# Altium PCB RCSS_B2B V3.0 20130320.PcbDoc (part 1 of 2)
Units mm, origin at the board's own origin, x right, y up, seen from the top; angles counter-clockwise.
Board outline 142.1 x 102.2 mm, 4 copper layers (Top Layer, Mid-Layer 1, Mid-Layer 2, Bottom Layer); 252 components, 153 nets, 735 pads, 222 vias.
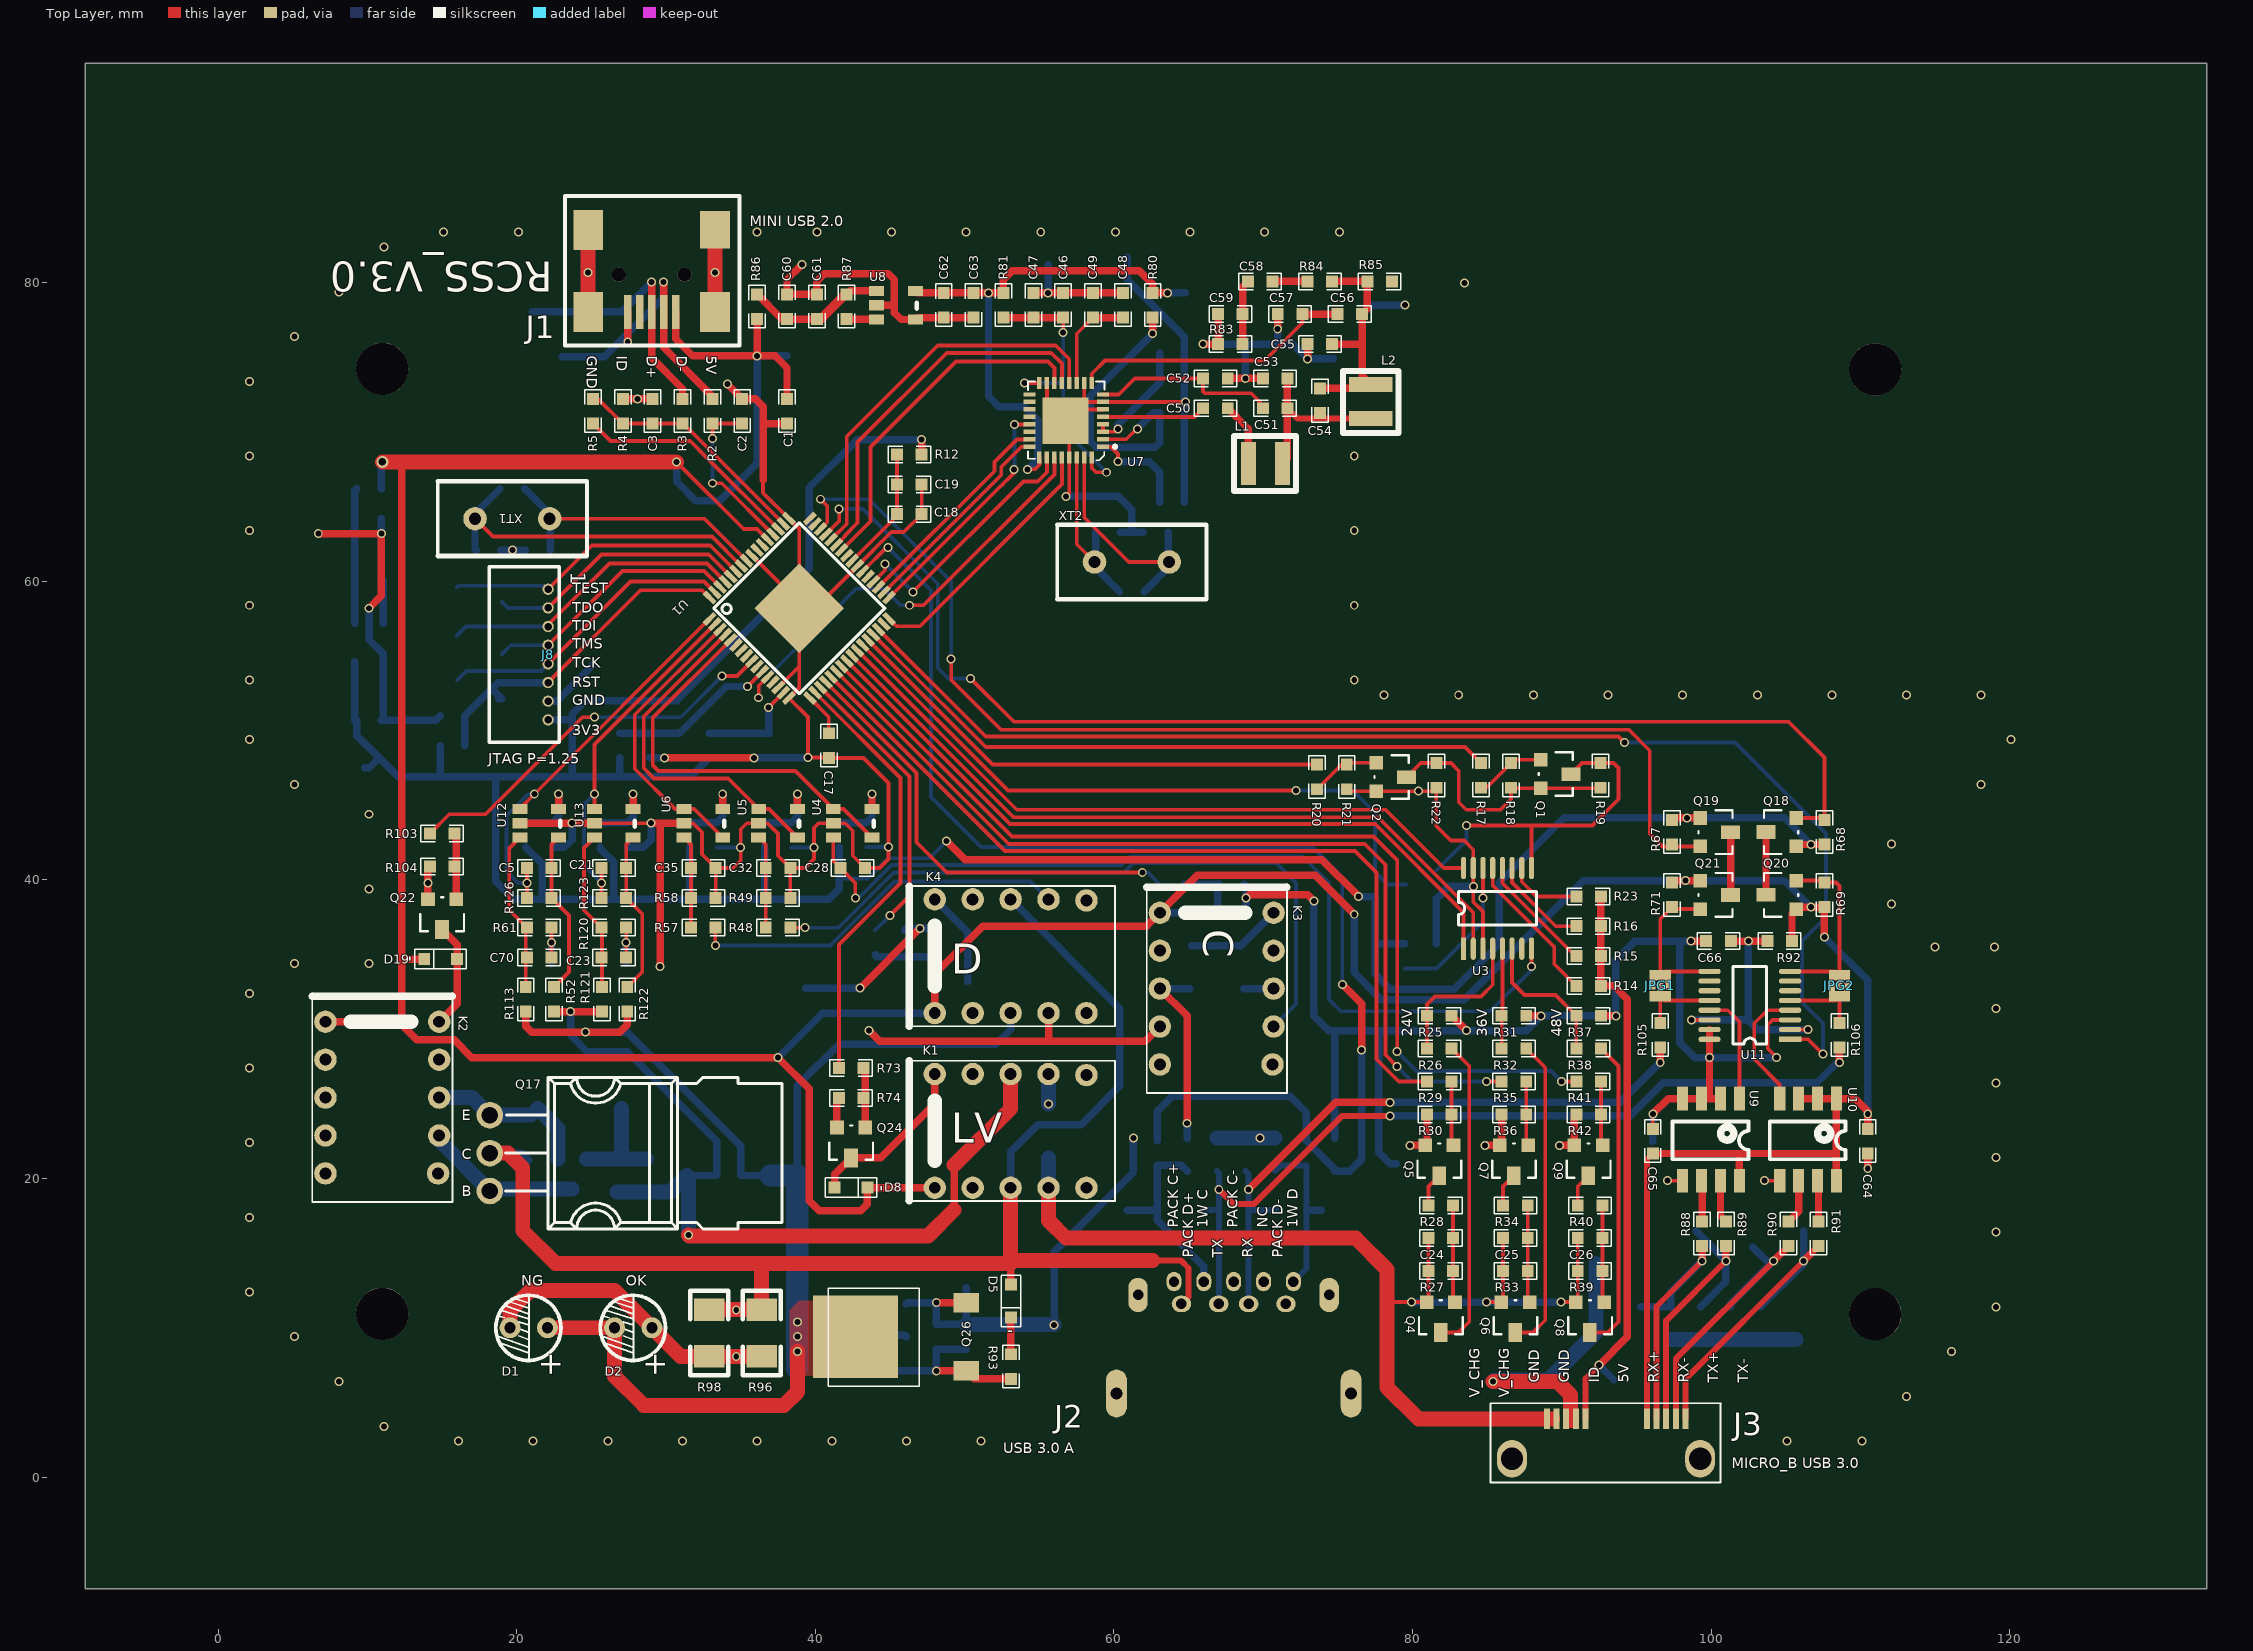
[diagram p0: Top Layer view]
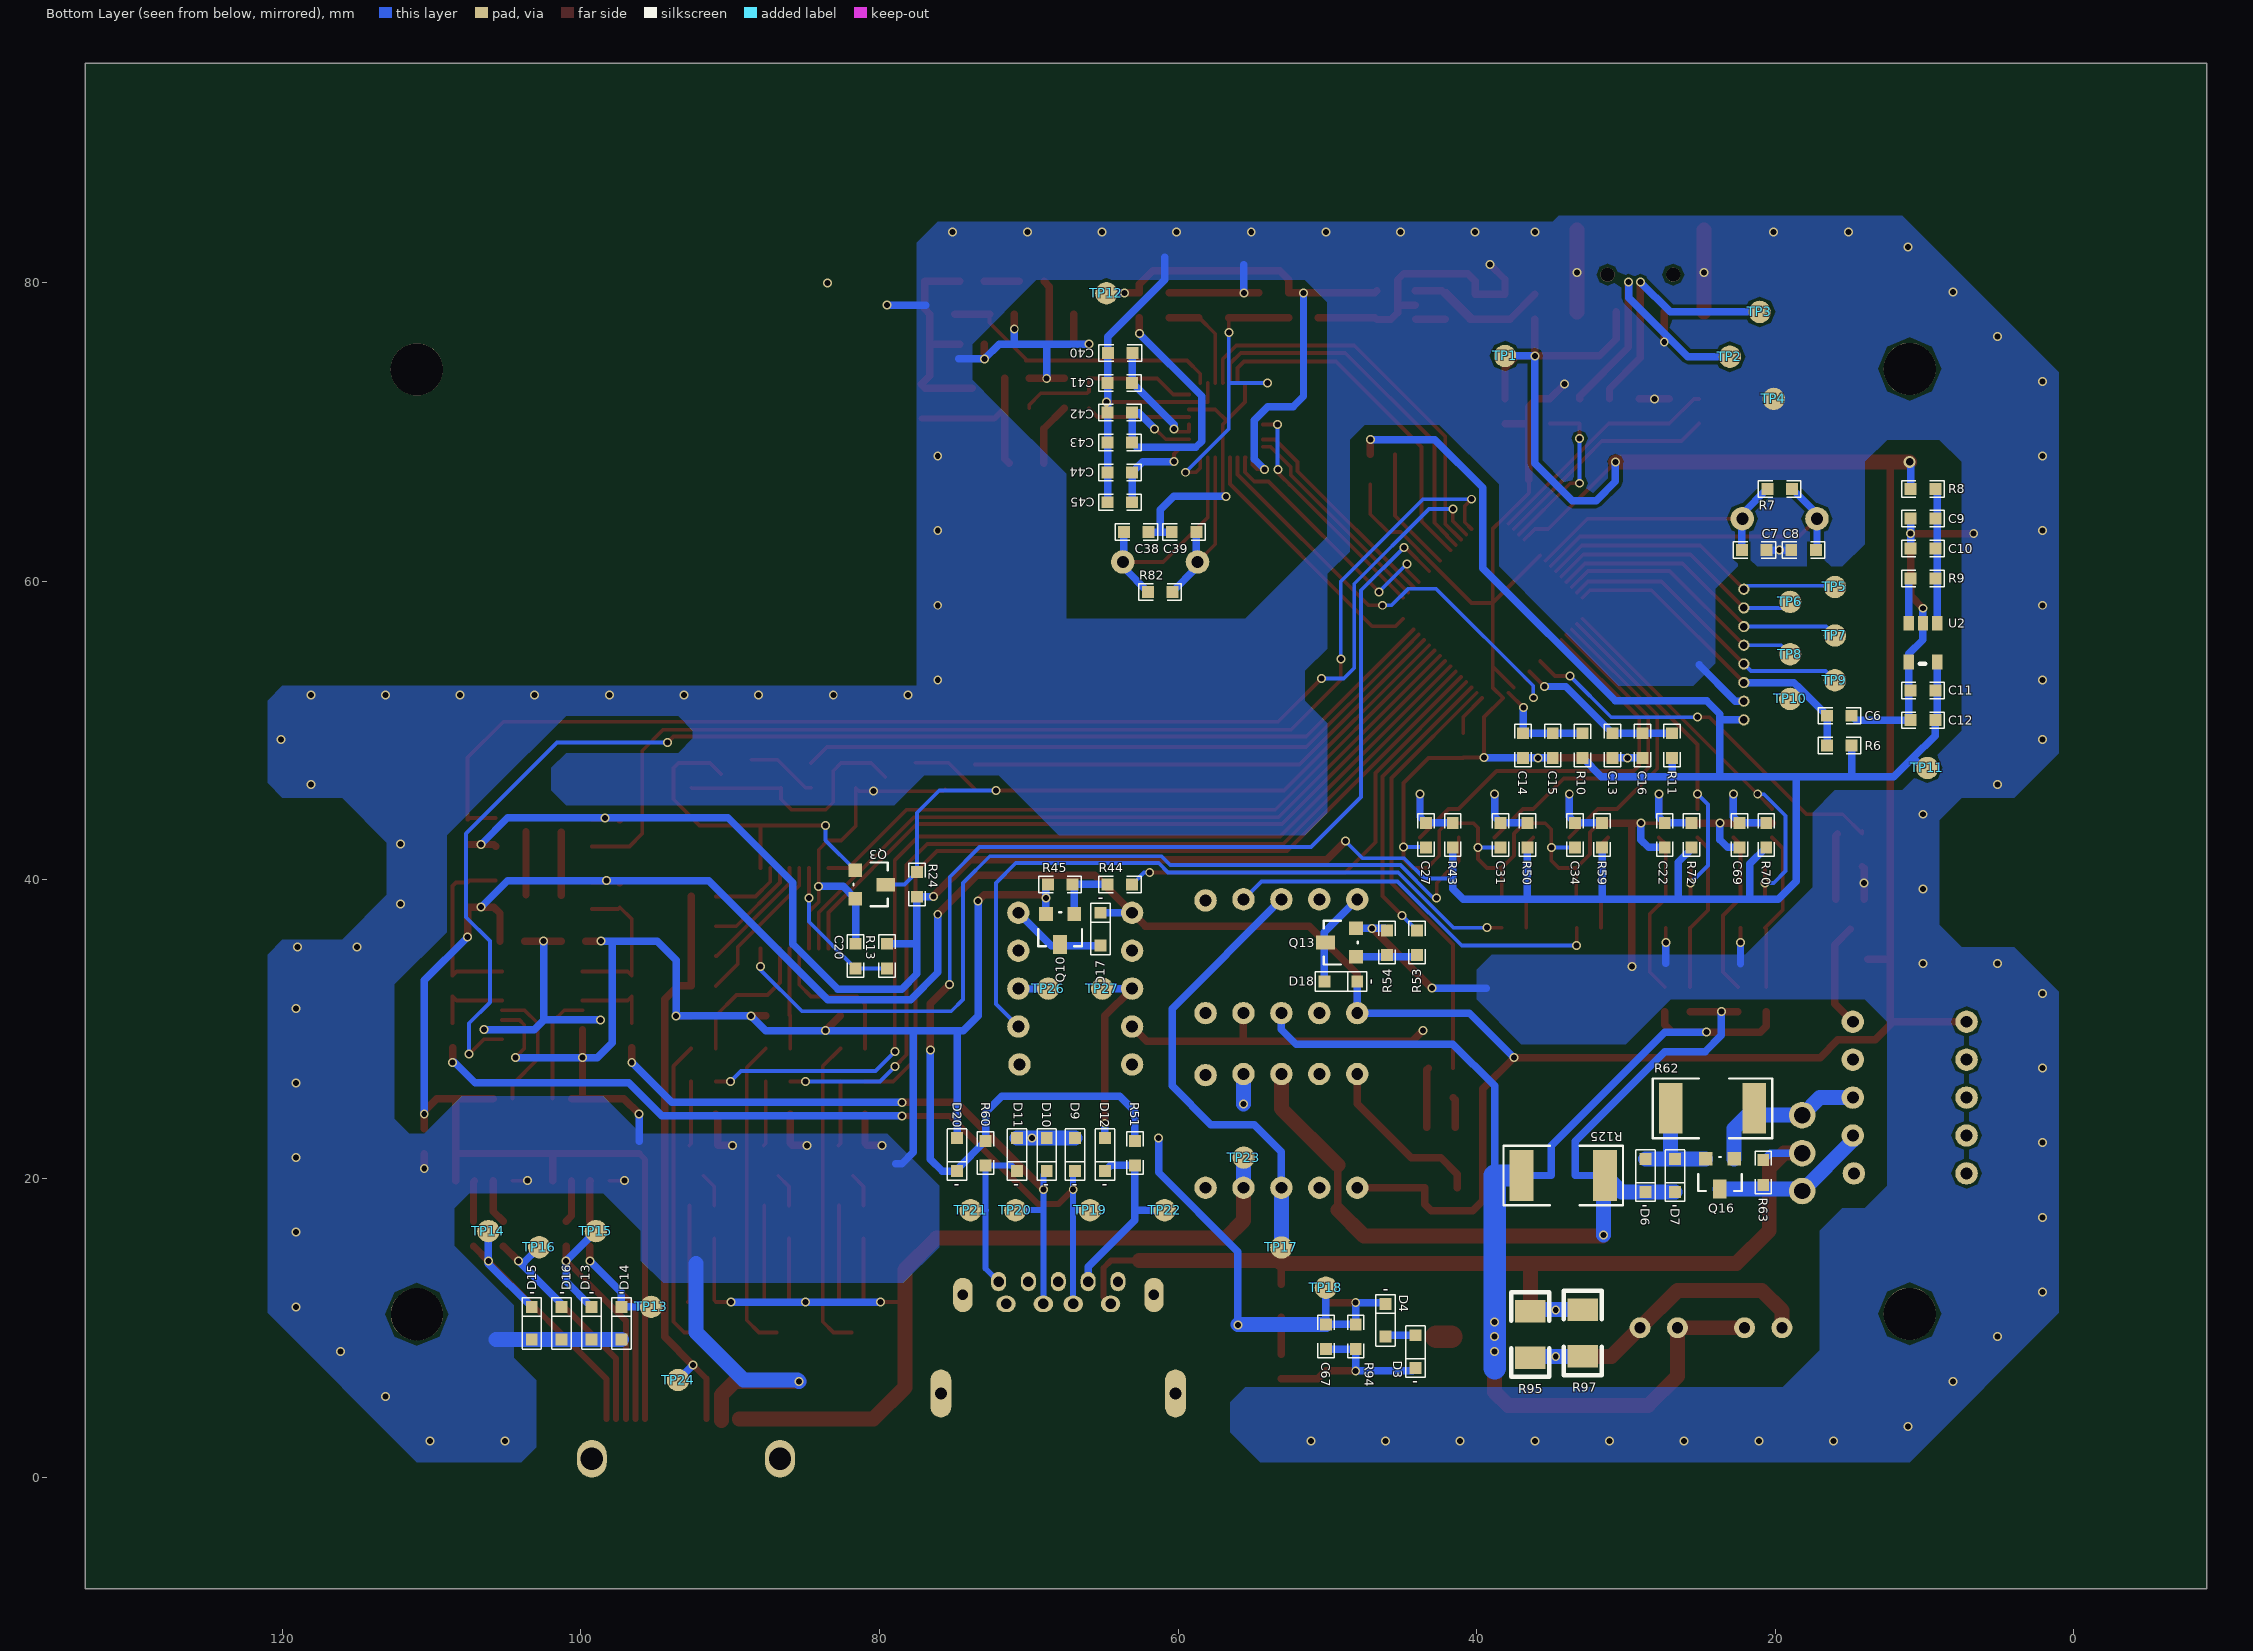
[diagram p1: Bottom Layer view, seen from below]
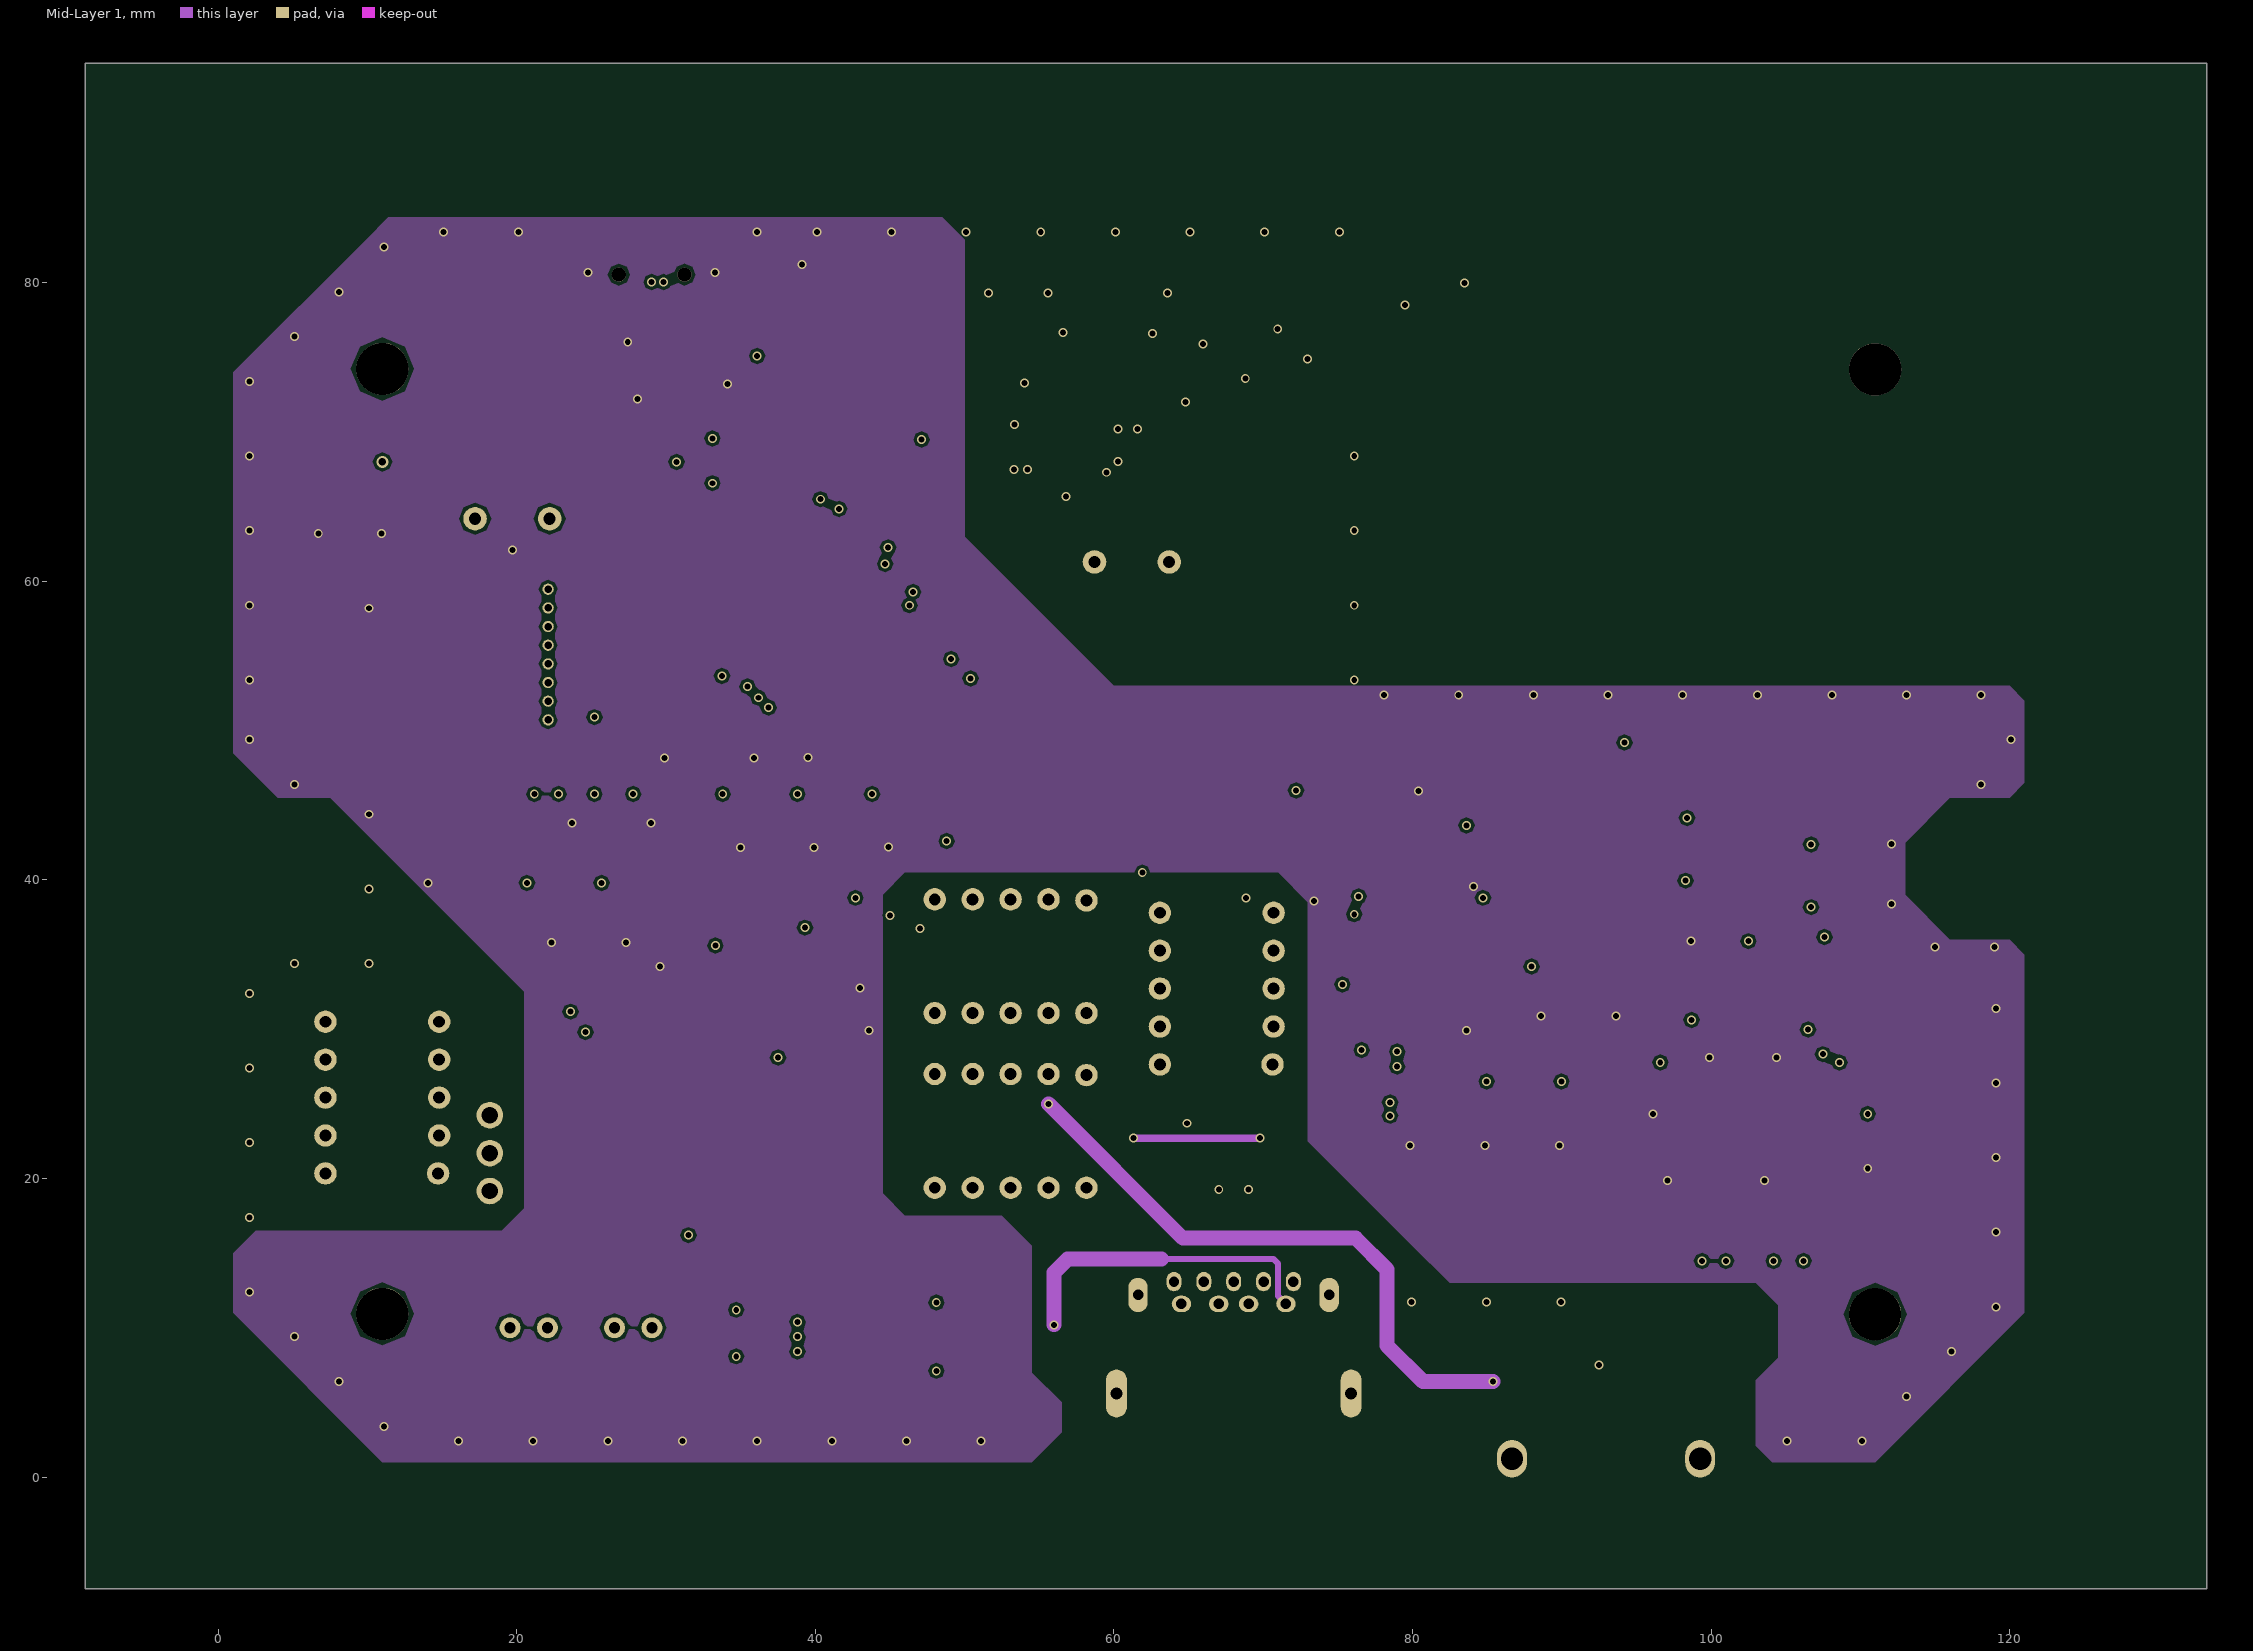
[diagram p2: Mid-Layer 1]
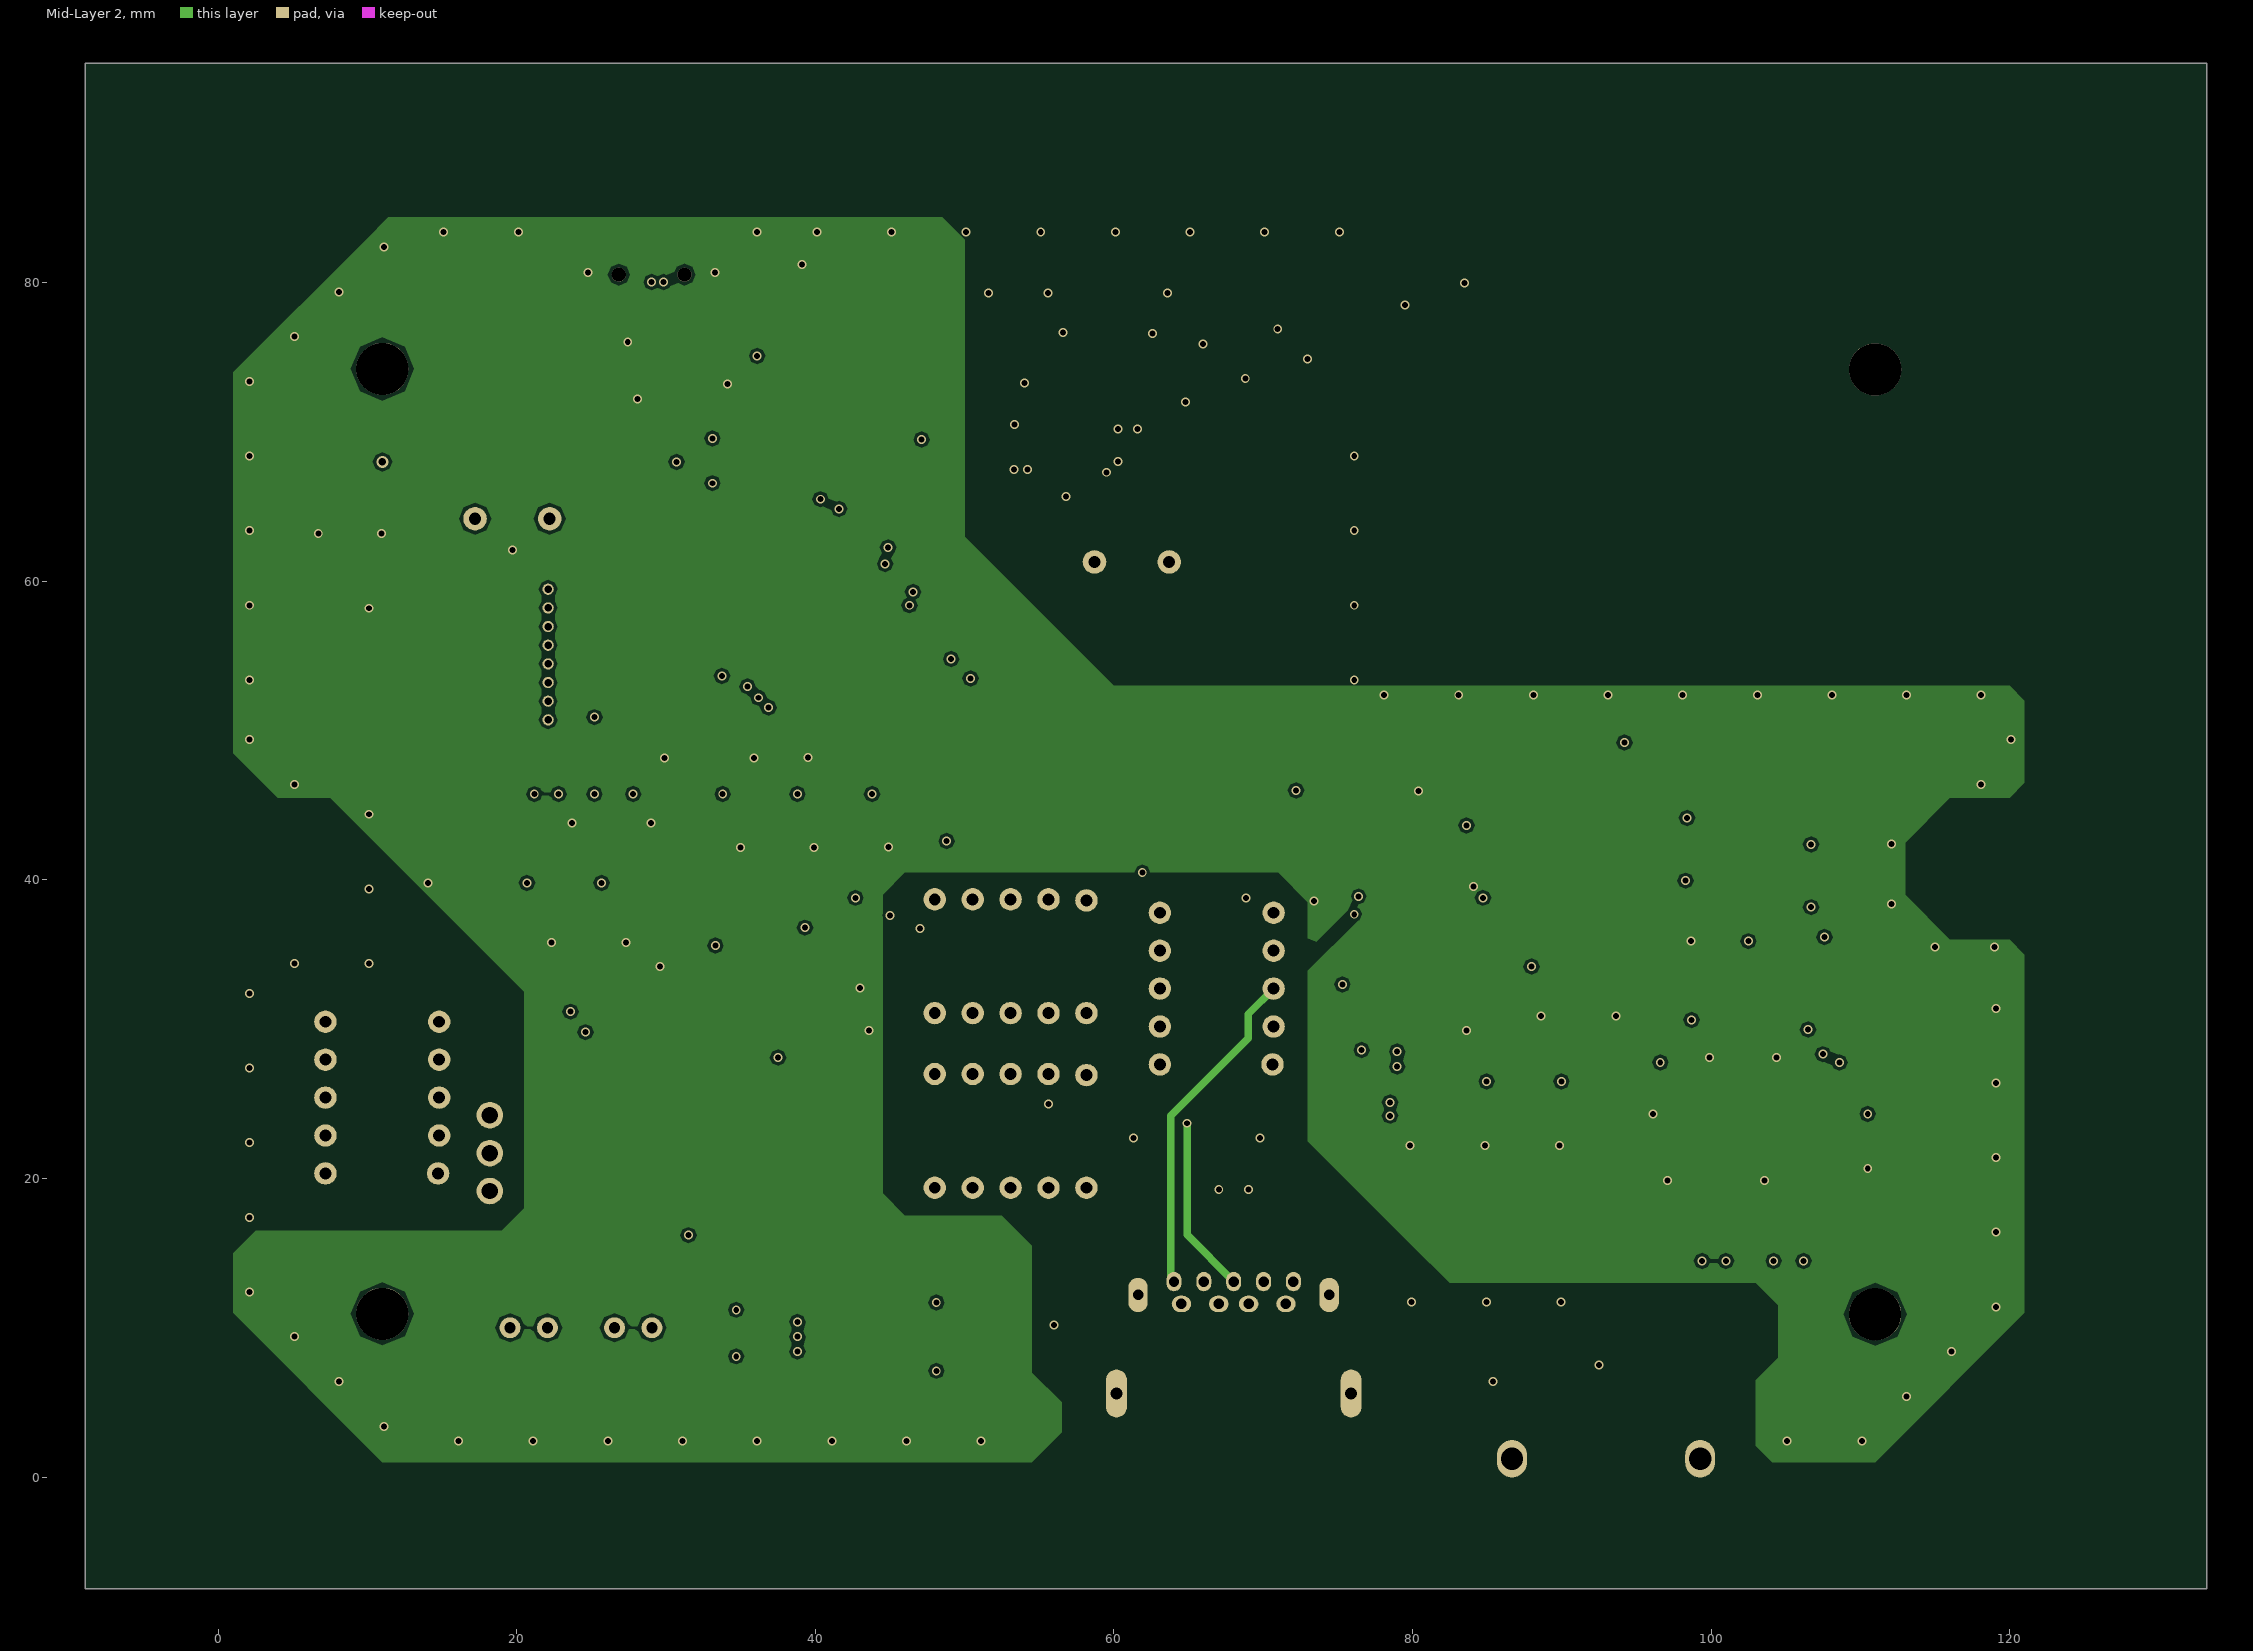
[diagram p3: Mid-Layer 2]

## Layer stack, top to bottom
Top Layer: signal copper 0.0356
Dielectric: core 0.32, FR-4, Dk 4.8
Mid-Layer 1: signal copper 0.0356
Dielectric: prepreg 0.32, FR-4, Dk 4.8
Mid-Layer 2: signal copper 0.0356
Dielectric: core 0.32, FR-4, Dk 4.8
Bottom Layer: signal copper 0.0356

## Board outline
-8.9,-7.5 -8.9,94.7 133.2,94.7 133.2,-7.5

## Design rules (kind name [scope] priority, off if disabled: settings)
Clearance keepout [OnLayer('Keep-Out Layer')] p1: gap=0.508
Clearance PAD [(InPadClass('All Pads')) vs (InPadClass('All Pads'))] p2: gap=0.254
Clearance [All] p3: gap=0.203
ComponentClearance [All] p1 off: gap=0.254 collisioncheckmode=3 verticalgap=0.254 showdistances=FALSE
PlaneConnect [All] p1: planeconnectstyle=Direct reliefexpansion=0.508 reliefentries=4 reliefconductorwidth=0.254 reliefairgap=0.254
PolygonConnect [All] p1: connectstyle=Direct reliefconductorwidth=0.254 reliefentries=4 polygonreliefangle="90 Angle"
RoutingVias [All] p1: holewidth=0.4 width=0.6 viastyle="Through Hole" minholewidth=0.4 minwidth=0.6 maxholewidth=0.4 maxwidth=1.27
SilkscreenOverComponentPads [All] p1: minsilkscreentomaskgap=0.254
SolderMaskExpansion [All] p1: expansion=0.102
Width [All] p1: maxlimit=3 minlimit=0.203 preferedwidth=0.254
25 further rules are at their usual default settings.

## Components (designator, comment, footprint, x,y, rotation, side; value= is the part's Value field where it differs from the comment)
C1 "4.7UF" 0603 38.1,71.4 r90 top
C2 "10PF" 0603 35.1,71.4 r90 top
C3 "10PF" 0603 29.1,71.4 r90 top
C5 "TBD" 0603 21.5,40.8 r0 top
C6 "2200PF" 0603 15.7,51 r0 bottom
C7 "10PF" 0603 21.4,62.1 r0 bottom
C8 "10PF" 0603 18.1,62.1 r0 bottom
C9 "0.1uF" 0603 10.1,64.2 r180 bottom
C10 "1UF" 0603 10.1,62.2 r180 bottom
C11 "0.1uF" 0603 10.1,52.7 r180 bottom
C12 "1uF" 0603 10.1,50.7 r180 bottom
C13 "0.1uF" 0603 30.9,49 r270 bottom
C14 "0.1uF" 0603 36.9,49 r270 bottom
C15 "10uF" 0603 34.9,49 r270 bottom
C16 "10uF" 0603 28.9,49 r270 bottom
C17 "0.47uF" 0603 40.9,49 r90 top
C18 "10uF" 0603 46.3,64.5 r0 top
C19 "0.1uF" 0603 46.3,66.5 r0 top
C20 "0.1uF" 0603 81.6,34.9 r270 bottom
C21 "TBD" 0603 26.5,40.8 r0 top
C22 "0.1uF" 0603 27.4,43 r270 bottom
C23 "0.1uF" 0603 26.5,34.8 r0 top
C24 "0.1uF" 0603 81.9,16 r0 top
C25 "0.1uF" 0603 86.9,16 r0 top
C26 "0.1uF" 0603 91.9,16 r0 top
C27 "0.1uF" 0603 43.4,43 r270 bottom
C28 "0.1uF" 0603 42.5,40.8 r0 top
C31 "0.1uF" 0603 38.4,43 r270 bottom
C32 "0.1uF" 0603 37.5,40.8 r0 top
C34 "0.1uF" 0603 33.4,43 r270 bottom
C35 "0.1uF" 0603 32.5,40.8 r0 top
C38 "27PF" 0603 62.8,63.3 r0 bottom
C39 "27PF" 0603 59.6,63.3 r0 bottom
C40 "0.01uF" 0603 63.875,75.3 r0 bottom
C41 "2.2uF" 0603 63.9,73.3 r0 bottom
C42 "0.01uF" 0603 63.9,71.3 r0 bottom
C43 "2.2uF" 0603 63.9,69.3 r0 bottom
C44 "0.01uF" 0603 63.9,67.3 r0 bottom
C45 "2.2uF" 0603 63.9,65.3 r0 bottom
C46 "2.2uF" 0603 56.6,78.5 r270 top
C47 "0.01uF" 0603 54.6,78.5 r270 top
C48 "2.2uF" 0603 60.6,78.5 r270 top
C49 "0.01uF" 0603 58.6,78.5 r270 top
C50 "3000pF" 0603 66.8,71.6 r180 top
C51 "1200pF" 0603 70.8,71.6 r180 top
C52 "1200pF" 0603 66.8,73.6 r0 top
C53 "680pF" 0603 70.8,73.6 r180 top
C54 "10pF" 0603 73.8,72.1 r270 top
C55 "100pF" 0603 73.8,75.9 r180 top
C56 "220pF" 0603 75.8,77.9 r180 top
C57 "680pF" 0603 71.8,77.9 r180 top
C58 "TBD" 0603 69.8,80.1 r0 top
C59 "TBD" 0603 67.8,77.9 r180 top
C60 "0.1uF" 0603 38.1,78.4 r270 top
C61 "1UF" 0603 40.1,78.4 r270 top
C62 "0.1uF" 0603 48.6,78.5 r90 top
C63 "1uF" 0603 50.6,78.5 r90 top
C64 "0.1uF" 0603 110.5,22.5 r270 top
C65 "0.1uF" 0603 96.1,22.5 r90 top
C66 "0.1uF" 0603 100.5,35.9 r0 top
C67 "0.1UF" 0603 50.1,9.4 r270 bottom
C69 "0.1uF" 0603 22.4,43 r270 bottom
C70 "0.1uF" 0603 21.5,34.8 r0 top
D1 "RLED" L-424 20.8,10 r90 top
D2 "GLED" L-424 27.8,10 r90 top
D3 "ZD15V" SOD-323 44.1,8.4 r270 bottom
D4 "ZD5.1V" SOD-323 46.1,10.5 r90 bottom
D5 "1N4148" SOD-323 53.1,11.8 r270 top
D6 "ZD15V" SOD-323 28.7,20.2 r270 bottom (schematic designator D4)
D7 "ZD15V" SOD-323 26.7,20.2 r270 bottom (schematic designator D4)
D8 "ZD15V" SOD-323 42.387,19.384 r0 top (schematic designator D4)
D9 "ZD5.1V" SOD-323 66.9,21.6 r270 bottom (schematic designator D4)
D10 "ZD5.1V" SOD-323 68.8,21.6 r270 bottom (schematic designator D4)
D11 "ZD15V" SOD-323 70.8,21.6 r270 bottom (schematic designator D4)
D12 "ZD15V" SOD-323 64.9,21.6 r270 bottom (schematic designator D4)
D13 "ZD15V" SOD-323 99.3,10.3 r90 bottom (schematic designator D4)
D14 "ZD15V" SOD-323 97.3,10.3 r90 bottom (schematic designator D4)
D15 "ZD15V" SOD-323 103.3,10.3 r90 bottom (schematic designator D4)
D16 "ZD5.1V" SOD-323 101.3,10.3 r90 bottom (schematic designator D4)
D17 "ZD15V" SOD-323 65.2,36.7 r90 bottom (schematic designator D4)
D18 "ZD15V" SOD-323 49.1,33.2 r180 bottom (schematic designator D4)
D19 "ZD15V" SOD-323 14.9,34.7 r180 top (schematic designator D4)
D20 "ZD15V" SOD-323 74.8,21.6 r270 bottom (schematic designator D4)
J1 "Comment" "MINI USB-5P" 34.9,85.8 r180 top
J2 "USB_B" USB_A_TYPE_1 71.525,11.595 r0 top
J3 "Comment" CP13 89,3.9 r0 top
J8 "connect_JTAG 8p" CON8/1.25 22.1,55.1 r180 top
JPG1 "S2" JPG 96.6,32.9 r270 top
JPG2 "S1" JPG 108.6,32.9 r90 top
K1 "A-3.3W-K, USD 0.7" A-RELAY 48,27 r0 top
K2 "A-5W-K" A-RELAY 14.8,30.5 r270 top (schematic designator K1)
K3 "A-5W-K" A-RELAY 70.7,37.8 r270 top (schematic designator K1)
K4 "A-5W-K" A-RELAY 48,38.7 r0 top (schematic designator K1)
L1 "150nH/1008" CFL1008 71.3,67.9 r90 top
L2 "330nH/1008" CFL1008 77.2,73.2 r180 top
Q1 "2N7002K" SOT-23 89.6,47.1 r270 top
Q2 "2N7002K" SOT-23 78.6,46.9 r270 top
Q3 "2N7002K" SOT-23 80.6,39.7 r270 bottom
Q4 "TP0610K" SOT-23 81.9,10.7 r180 top
Q5 "2N7002K" SOT-23 81.8,21.2 r180 top
Q6 "TP0610K" SOT-23 86.9,10.7 r180 top
Q7 "2N7002K" SOT-23 86.8,21.2 r180 top
Q8 "TP0610K" SOT-23 91.9,10.7 r180 top
Q9 "2N7002K" SOT-23 91.8,21.2 r180 top
Q10 "2N7002K" SOT-23 67.9,36.7 r0 bottom
Q13 "2N7002K" SOT-23 49.1,35.8 r90 bottom
Q16 "2N3904" SOT-23 23.7,20.3 r0 bottom
Q17 "TIP122" TO220 26.5,21.7 r90 top
Q18 "2N7002K" SOT-23 104.7,43.2 r90 top
Q19 "2N7002K" SOT-23 100.3,43.2 r270 top
Q20 "2N7002K" SOT-23 104.7,39 r90 top
Q21 "2N7002K" SOT-23 100.3,39 r270 top
Q22 "2N7002K" SOT-23 15,37.7 r180 top
Q24 "2N7002K" SOT-23 42.4,22.4 r180 top
Q26 "AM40N10-30" TO252 46.4,9.4 r90 top
R2 "10R" 0603 33.1,71.4 r90 top
R3 "10R" 0603 31.1,71.4 r270 top
R4 "1M" 0603 27.1,71.4 r90 top
R5 "1K" 0603 25.1,71.4 r270 top
R6 "10K" 0603 15.7,49 r0 bottom
R7 "1M" 0603 19.7,66.2 r0 bottom
R8 "10R" 0603 10.1,66.2 r180 bottom
R9 "100K" 0603 10.1,60.2 r180 bottom
R10 "10R" 0603 32.9,49 r90 bottom
R11 "10R" 0603 26.9,49 r270 bottom
R12 "10R" 0603 46.3,68.5 r180 top
R13 "10R" 0603 79.5,34.9 r270 bottom
R14 "100K" 0603 91.8,32.9 r0 top
R15 "330K" 0603 91.8,34.9 r0 top
R16 "680K" 0603 91.8,36.9 r0 top
R17 "1K" 0603 84.6,47 r270 top
R18 "100K" 0603 86.6,47 r90 top
R19 "100K" 0603 92.6,47 r270 top
R20 "1K" 0603 73.6,46.9 r270 top
R21 "100K" 0603 75.6,46.9 r90 top
R22 "100K" 0603 81.6,47 r270 top
R23 "TBD" 0603 91.8,38.9 r0 top
R24 "10K" 0603 77.5,39.7 r270 bottom
R25 "1K" 0603 81.8,30.9 r180 top
R26 "15K" 0603 81.8,28.7 r180 top
R27 "510K" 0603 81.9,13.8 r180 top
R28 "1M" 0603 81.9,18.2 r180 top
R29 "1K" 0603 81.8,26.5 r0 top
R30 "100K" 0603 81.8,24.3 r0 top
R31 "1K" 0603 86.8,30.9 r180 top
R32 "22K" 0603 86.8,28.7 r180 top
R33 "510K" 0603 86.9,13.8 r180 top
R34 "1M" 0603 86.9,18.2 r180 top
R35 "1K" 0603 86.8,26.5 r0 top
R36 "100K" 0603 86.8,24.3 r0 top
R37 "1K" 0603 91.8,30.9 r180 top
R38 "30K" 0603 91.8,28.7 r180 top
R39 "510K" 0603 91.9,13.8 r180 top
R40 "1M" 0603 91.9,18.2 r180 top
R41 "1K" 0603 91.8,26.5 r0 top
R42 "100K" 0603 91.8,24.3 r0 top
R43 "10R" 0603 41.6,43 r270 bottom
R44 "1K" 0603 63.9,39.7 r0 bottom
R45 "100K" 0603 67.9,39.7 r0 bottom
R48 "2M2" 0603 37.5,36.8 r180 top
R49 "100K" 0603 37.5,38.8 r180 top
R50 "10R" 0603 36.6,43 r90 bottom
R51 "47K" 0603 62.9,21.7 r90 bottom
R52 "TBD" 0603 22.5,32 r270 top
R53 "1K" 0603 44,35.8 r270 bottom
R54 "100K" 0603 46,35.8 r90 bottom
R57 "2M2" 0603 32.5,36.8 r180 top
R58 "100K" 0603 32.5,38.8 r180 top
R59 "10R" 0603 31.6,43 r90 bottom
R60 "47K" 0603 72.9,21.7 r90 bottom
R61 "TBD" 0603 21.5,36.8 r0 top
R62 "3.3R" 2512 24.2,24.7 r0 bottom
R63 "100K" 0603 20.8,20.4 r270 bottom
R67 "3.3K" 0603 97.4,43.2 r270 top
R68 "3.3K" 0603 107.6,43.2 r90 top
R69 "3.3K" 0603 107.6,39 r90 top
R70 "10R" 0603 20.6,43 r90 bottom
R71 "3.3K" 0603 97.4,39 r270 top
R72 "10R" 0603 25.6,43 r90 bottom
R73 "1K" 0603 42.4,27.4 r180 top
R74 "100K" 0603 42.4,25.4 r0 top
R80 "10R" 0603 62.6,78.5 r270 top
R81 "10R" 0603 52.6,78.5 r270 top
R82 "1M" 0603 61.2,59.3 r0 bottom
R83 "TBD" 0603 67.8,75.9 r0 top
R84 "0R" 0603 73.8,80.1 r0 top
R85 "0R" 0603 77.8,80.1 r0 top
R86 "10R" 0603 36.1,78.4 r90 top
R87 "100K" 0603 42.1,78.4 r90 top
R88 "10R" 0603 99.4,16.3 r270 top
R89 "10R" 0603 101,16.3 r270 top
R90 "10R" 0603 105.2,16.3 r270 top
R91 "10R" 0603 107.2,16.3 r270 top
R92 "10R" 0603 104.6,35.9 r0 top
R93 "100K" 0603 53.1,7.4 r90 top
R94 "330K" 0603 48.1,9.4 r90 bottom
R95 "22K/1206" 1206 36.4,9.7 r270 bottom
R96 "22K/1206" 1206 36.4,9.8 r270 top
R97 "22K/1206" 1206 32.9,9.8 r270 bottom
R98 "22K/1206" 1206 32.9,9.8 r270 top
R103 "1K" 0603 15,43.1 r180 top
R104 "100K" 0603 15,40.9 r0 top
R105 "10R" 0603 96.6,29.6 r90 top
R106 "10R" 0603 108.6,29.6 r90 top
R113 "TBD" 0603 20.6,32 r270 top
R120 "100K" 0603 26.5,36.8 r0 top
R121 "1K" 0603 25.7,32 r270 top
R122 "1K" 0603 27.4,32 r270 top
R123 "100K" 0603 26.5,38.8 r180 top
R125 "100mR" 2512 34.2,20.2 r0 bottom
R126 "TBD" 0603 21.5,38.8 r180 top
TP1 "IMPORTANT TP" T-1.5#1 38.1,75.1 r0 top
TP2 "IMPORTANT TP" T-1.5#1 23.032,75.05 r90 top
TP3 "IMPORTANT TP" T-1.5#1 21.032,78.05 r90 top
TP4 "IMPORTANT TP" T-1.5#1 20.1,72.225 r90 top
TP5 "IMPORTANT TP" T-1.5#1 16,59.625 r0 top
TP6 "IMPORTANT TP" T-1.5#1 19,58.625 r0 top
TP7 "IMPORTANT TP" T-1.5#1 16,56.375 r0 top
TP8 "IMPORTANT TP" T-1.5#2 19,55.125 r180 bottom
TP9 "IMPORTANT TP" T-1.5#1 16,53.375 r0 top
TP10 "IMPORTANT TP" T-1.5#2 19,52.125 r180 bottom
TP11 "IMPORTANT TP" T-1.5#1 9.8,47.5 r0 top
TP12 "IMPORTANT TP" T-1.5#1 64.8,79.3 r0 top
TP13 "IMPORTANT TP" T-1.5#1 95.3,11.4 r270 top
TP14 "IMPORTANT TP" T-1.5#1 106.2,16.475 r270 top
TP15 "IMPORTANT TP" T-1.5#1 99,16.475 r270 top
TP16 "IMPORTANT TP" T-1.5#1 102.8,15.4 r270 top
TP17 "IMPORTANT TP" T-1.5#1 53.08,15.38 r90 top
TP18 "IMPORTANT TP" T-1.5#1 50.1,12.685 r90 top
TP19 "IMPORTANT TP" T-1.5#2 65.9,17.875 r270 bottom
TP20 "IMPORTANT TP" T-1.5#2 70.9,17.875 r270 bottom
TP21 "IMPORTANT TP" T-1.5#2 73.9,17.875 r270 bottom
TP22 "IMPORTANT TP" T-1.5#2 60.9,17.875 r270 bottom
TP23 "IMPORTANT TP" T-1.5#1 55.6,21.4 r90 top
TP24 "IMPORTANT TP" T-1.5#1 93.5,6.5 r90 top
TP26 "IMPORTANT TP" T-1.5#1 68.7,32.72 r90 top
TP27 "IMPORTANT TP" T-1.5#1 65.08,32.72 r90 top
U1 "MSP430F5510" MSP430F5510 33.2,58.2 r45 top
U2 "ADP122-3.3V" SOT-23-5 10.1,55.9 r90 bottom
U3 "ADG1609" TSSOP-16 85.7,38.1 r90 top
U4 "OPA376" SOT-23-5 42.5,43.8 r180 top
U5 "OPA376" SOT-23-5 37.5,43.8 r180 top
U6 "OPA376" SOT-23-5 32.5,43.8 r180 top
U7 "TRF7970A" "QFN THIN-N32" 56.8,70.8 r90 top
U8 "ADP122-3.3V" SOT-23-5 45.4,78.5 r180 top
U9 "SN75176" SO-8 100,22.6 r270 top
U10 "SN75176" SO-8 106.5,22.6 r270 top
U11 "ADG1609" TSSOP-16 102.6,31.6 r180 top
U12 "OPA376" SOT-23-5 21.5,43.8 r180 top
U13 "OPA376" SOT-23-5 26.5,43.8 r180 top
XT1 "4MHz" AXIAL-5 19.7,64.2 r270 top (schematic designator X1)
XT2 "13.56MHz" AXIAL-5 61.2,61.3 r270 top (schematic designator X1)

## Footprints (in the part's own frame and the unit in brackets; to place one, negate y for a bottom-side part, rotate by r counter-clockwise, add the part's x,y. Pads: shape width x height; smd on the part's side, far side on the other; paste and mask are expansions set on the pad)
0603 [mm]
  rect 0.8x0.8 smd: 1(-0.825,0) 2(0.825,0)
  silkscreen extent -1.42,-0.55 1.43,0.55
1206 [mm]
  rect 1.52x2.03 smd: 1(-1.415,0) 2(1.715,0)
  silkscreen extent -2.68,-1.27 2.98,1.27
2512 [mm]
  rect 1.6x3.4 smd: 1(-2.8,0) 2(2.8,0)
  silkscreen extent -4,-2 4,2
A-RELAY [mm]
  round 1.5 hole 0.8: 1(0,0) 2(2.54,0) 3(5.08,0) 4(7.62,0) 5(10.16,-0.073) 6(10.16,-7.62) 7(7.62,-7.62) 8(5.08,-7.62) 9(2.54,-7.62) 10(0,-7.62)
  silkscreen extent -1.92,-8.5 12.08,0.89
AXIAL-5 [mil]
  round 62 hole 32: 1(0,98.43) 2(0,-98.43)
  silkscreen extent -98,-197 98,197
CFL1008 [mm]
  rect 2.9x1.015 smd: 1(0,0) 2(0,2.285)
  silkscreen extent -1.85,-0.9 1.85,3.25
CON8/1.25 [mm]
  round 0.75 hole 0.5: 1(0,-4.375) 2(0,-3.125) 3(0,-1.875) 4(0,-0.625) 5(0,0.625) 6(0,1.875) 7(0,3.125) 8(0,4.375)
  silkscreen extent -0.75,-5.87 3.95,5.87
CP13 [mm]
  rect 0.4x1.35 smd: 1(0,0) 2(0.65,0) 3(1.3,0) 4(1.95,0) 5(2.6,0) 6(6.7,0) 7(7.35,0) 8(8,0) 9(8.65,0) 10(9.3,0)
  oval 2x2.5 hole 1.5: ""(-2.33,-2.675) ""(10.27,-2.675)
  silkscreen extent -3.78,-4.27 11.68,1.04
JPG [mm]
  rect 0.7x1.41 smd: 1(-0.705,0) 2(0.705,0)
  rect 0.6x0.4 smd: 1(-0.062,0.506) 1(-0.062,-0.506) 2(0.064,0.002)
L-424 [mm]
  round 1.4 hole 0.75: 1(0,1.25) 2(0,-1.25)
  silkscreen extent -2.18,-2.16 2.18,2.21
"MINI USB-5P" [mm]
  rect 2x2.69 smd: 0(1.618,7.75) 0(10.118,7.75) 0(10.118,2.25)
  rect 2x2.5 smd: 0(1.618,2.25)
  round 0.95 hole 0.95 unplated: 0(3.668,5.25) 0(8.068,5.25)
  rect 0.5x2.3 smd: 1(7.468,7.75) 2(6.668,7.75) 3(5.868,7.75) 4(5.068,7.75) 5(4.268,7.75)
  silkscreen extent -0.01,-0.01 11.67,10
MSP430F5510 [mm]
  rect 4.25x4.25 smd: 0(4.05,-4.05)
  rect 1x0.35 smd: 1(-0.7,-0.3) 2(-0.7,-0.8) 3(-0.7,-1.3) 4(-0.7,-1.8) 5(-0.7,-2.3) 6(-0.7,-2.8) 7(-0.7,-3.3) 8(-0.7,-3.8) 9(-0.7,-4.3) 10(-0.7,-4.8) 11(-0.7,-5.3) 12(-0.7,-5.8) 13(-0.7,-6.3) 14(-0.7,-6.8) 15(-0.7,-7.3) 16(-0.7,-7.8) 33(8.8,-7.8) 34(8.8,-7.3) 35(8.8,-6.8) 36(8.8,-6.3) 37(8.8,-5.8) 38(8.8,-5.3) 39(8.8,-4.8) 40(8.8,-4.3) 41(8.8,-3.8) 42(8.8,-3.3) 43(8.8,-2.8) 44(8.8,-2.3) 45(8.8,-1.8) 46(8.8,-1.3) 47(8.8,-0.8) 48(8.8,-0.3)
  rect 0.35x1 smd: 17(0.3,-8.8) 18(0.8,-8.8) 19(1.3,-8.8) 20(1.8,-8.8) 21(2.3,-8.8) 22(2.8,-8.8) 23(3.3,-8.8) 24(3.8,-8.8) 25(4.3,-8.8) 26(4.8,-8.8) 27(5.3,-8.8) 28(5.8,-8.8) 29(6.3,-8.8) 30(6.8,-8.8) 31(7.3,-8.8) 32(7.8,-8.8) 49(7.8,0.7) 50(7.3,0.7) 51(6.8,0.7) 52(6.3,0.7) 53(5.8,0.7) 54(5.3,0.7) 55(4.8,0.7) 56(4.3,0.7) 57(3.8,0.7) 58(3.3,0.7) 59(2.8,0.7) 60(2.3,0.7) 61(1.8,0.7) 62(1.3,0.7) 63(0.8,0.7) 64(0.3,0.7)
  silkscreen extent 0,-8.1 8.1,0
"QFN THIN-N32" [mm]
  rect 0.3x0.8 smd: 1(-1.781,-2.465) 2(-1.281,-2.465) 3(-0.781,-2.465) 4(-0.281,-2.465) 5(0.219,-2.465) 6(0.719,-2.465) 7(1.219,-2.465) 8(1.719,-2.465) 17(1.719,2.465) 18(1.219,2.465) 19(0.719,2.465) 20(0.219,2.465) 21(-0.281,2.465) 22(-0.781,2.465) 23(-1.281,2.465) 24(-1.781,2.465)
  rect 0.8x0.3 smd: 9(2.49,-1.713) 10(2.49,-1.213) 11(2.49,-0.713) 12(2.49,-0.213) 13(2.49,0.287) 14(2.49,0.787) 15(2.49,1.287) 16(2.49,1.787) 25(-2.49,1.787) 26(-2.49,1.287) 27(-2.49,0.787) 28(-2.49,0.287) 29(-2.49,-0.213) 30(-2.49,-0.713) 31(-2.49,-1.213) 32(-2.49,-1.713)
  rect 3.1x3.1 smd: 33(-0.031,0.037)
  silkscreen extent -2.69,-3.33 2.58,2.57
SO-8 [mm]
  rect 1.6x0.76 smd: 1(-2.75,1.905) 2(-2.75,0.635) 3(-2.75,-0.635) 4(-2.75,-1.905) 5(2.75,-1.905) 6(2.75,-0.635) 7(2.75,0.635) 8(2.75,1.905)
  round 0.5 on Top Overlay: 33(-4.177,1.907)
  silkscreen extent -1.23,-2.57 1.31,2.51
SOD-323 [mm]
  rect 0.8x0.8 smd: 1(1.1,0) 2(-1.1,0)
  silkscreen extent -1.72,-0.65 1.73,0.65
SOT-23 [mil]
  rect 36x36 smd: 1(-37.5,-40) 2(37.5,-40)
  rect 36x50 smd: 3(0.5,40)
  silkscreen extent -58,-45 58,45
SOT-23-5 [mm]
  rect 0.99x0.69 smd: 1(1.295,-0.955)
  rect 1x0.69 smd: 2(1.295,0) 3(1.295,0.955) 4(-1.295,0.955) 5(-1.295,-0.955)
  silkscreen extent -1.4,-0.16 -1.4,0.22
T-1.5#1 [mm]
  round 1.5 smd far side: 1(0,0)
T-1.5#2 [mm]
  round 1.5 smd: 1(0,0)
TO220 [mil]
  round 70 hole 43.31: 1(-100,326.87) 2(100,326.87) 3(0,326.87)
  silkscreen extent -200,-444 200,285
TO252 [mm]
  rect 1.3x1.7 smd: 1(-2.285,-3.7) 2(2.285,-3.7)
  rect 5.5x5.7 smd: 3(0,3.7)
  silkscreen extent -3.32,-0.58 3.26,5.52
TSSOP-16 [mm]
  rect 1.5x0.35 smd: 1(-2.7,2.275)
  oval 1.5x0.35 smd: 2(-2.7,1.625) 3(-2.7,0.975) 4(-2.7,0.325) 5(-2.7,-0.325) 6(-2.7,-0.975) 7(-2.7,-1.625) 8(-2.7,-2.275) 9(2.7,-2.275) 10(2.7,-1.625) 11(2.7,-0.975) 12(2.7,-0.325) 13(2.7,0.325) 14(2.7,0.975) 15(2.7,1.625) 16(2.7,2.275)
  round 0.5 on Top Overlay: 48(-4.02,2.285)
  silkscreen extent -1.12,-2.6 1.12,2.6
USB_A_TYPE_1 [mm]
  oval 1.4x3.2 hole 0.8: 0(-11.356,-5.999) 0(4.366,-5.999)
  oval 1.3x2.3 hole 0.7: 0(-9.909,0.605) 0(2.893,0.605)
  oval 1.3x1.1 hole 0.7: 1(-7,0) 2(-4.5,0) 3(-2.5,0) 4(0,0)
  oval 1x1.3 hole 0.7: 5(0.5,1.5) 6(-1.5,1.5) 7(-3.5,1.5) 8(-5.5,1.5) 9(-7.5,1.5)

## Part data
C1 C2 C3 C6 C13 C14 C15 C16 C17 C18 C19 C20 C64 C65 C66: library part Cap, "Capacitor"
C5 C7 C8 C9 C10 C11 C12 C21 C22 C23 C24 C25 C26 C27 C28 C31 C32 C34 C35 C38 C39 C40 C41 C42 C43 C44 C45 C46 C47 C48 C49 C50 C51 C52 C53 C54 C55 C56 C57 C58 C59 C60 C61 C62 C63 C67 C69 C70 XT1 XT2: library part CAP, "Capacitor"
D1 D2: library part LED
D3 D4 D5 D6 D7 D8 D9 D10 D11 D12 D13 D14 D15 D16 D17 D18 D19 D20: library part ZENER2, "Zener Diode"
JPG1 JPG2: library part SMALL-SHORT
K1 K2 K3 K4: library part RELAY_10P_12V
L1 L2 R2 R3 R4 R5 R6 R7 R8 R9 R10 R11 R12 R13 R14 R15 R16 R17 R18 R19 R20 R21 R22 R23 R24 R25 R26 R27 R28 R29 R30 R31 R32 R33 R34 R35 R36 R37 R38 R39 R40 R41 R42 R43 R44 R45 R48 R49 R50 R51 R52 R53 R54 R57 R58 R59 R60 R61 R62 R63 R67 R68 R69 R70 R71 R72 R73 R74 R80 R81 R82 R83 R84 R85 R86 R87 R88 R89 R90 R91 R92 R93 R94 R95 R96 R97 R98 R103 R104 R105 R106 R113 R120 R121 R122 R125: library part RES
Q1 Q2 Q3 Q5 Q7 Q9 Q10 Q13 Q18 Q19 Q20 Q21 Q22 Q24 Q26: library part N-MOSFET
Q4 Q6 Q8: library part P-MOSFET
Q16 Q17: library part NPN, "PNP Transistor"
R123 R126: library part RES1
U2 U8: library part ADP121-3.3V
U3 U11: library part DS2760
U4 U5 U6 U12 U13: library part TLV2711CDBV, "Quad 2-INPUT NAND SCHMITT TRIGGER"

## Free pads (board coordinates)
  round 3.5 hole 3.5 unplated: 0(10.992,10.929) 0(10.992,74.229) 0(110.992,10.9) 0(111,74.2)

## Via types
v1: diameter 0.6, hole 0.4, Top Layer to Bottom Layer, tented both sides, 221 vias
v2: diameter 0.8, hole 0.5, Top Layer to Bottom Layer, tented both sides, 1 vias

## Nets (pads, with @x,y where several pads share a name; then routed paths per layer and width w, separated by ;. In a path a pad name is that pad's centre, name@x,y a point inside that pad or via, vN(x,y) a via of type N, cw(c..) or ccw(c..) an arc to the next point about the centre after c; other vN are vias at no path point)
1W: D20.1 R51.2 R60.2 U1.38 | length 89.1
  Top Layer w0.254: U1.38@43.17,60.675 44.77,62.275 v1(44.87,62.275)
  Top Layer w0.5: v1(75.3,33) 76.6,31.7 v1(76.6,28.6)
  Bottom Layer w0.254: v1(44.87,62.275) 47.743,59.402 47.743,45.557 51.1,42.2 73.3,42.2 75.3,40.2 v1(75.3,33)
  Bottom Layer w0.5: R51.2@62.9,22.525 62.9,24.5 63.9,25.5 71.8,25.5 72.9,24.4 R60.2@72.9,22.525 74.8,20.625 D20.1@74.8,20.5 75.8,20.5 76.6,21.3 v1(76.6,28.6)
"1W C": D12.1 J2.8 R51.1 TP22.1 | length 13.2
  Bottom Layer w0.5: TP22.1@60.9,17.875 62.825,17.875 ; D12.1@64.9,20.5 64.525,20.875 R51.1@62.9,20.875 62.9,17.2 66.025,14.075 J2.8@66.025,13.095
"1W D": D11.1 J2.5 R60.1 TP21.1 | length 11.4
  Bottom Layer w0.4: D11.1@70.8,20.5 71.175,20.875 R60.1@72.9,20.875 72.9,13.97 J2.5@72.025,13.095
  Bottom Layer w0.5: 72.925,17.875 TP21.1@73.9,17.875
3V3: C11.2 C12.2 J8.8 Q18.1 Q19.1 R6.1 R10.1 R11.2 R12.1 R13.1 R24.2 R43.2 R50.1 R59.1 R67.1 R68.1 R70.1 R72.1 TP11.1 U2.5 | length 210.8
  Top Layer w0.5: R12.1@47.125,68.5 v1(47.125,69.5) ; v1(48.8,42.6) 50.037,41.363 73.937,41.363 v1(76.4,38.9) ; R67.1@97.4,44.025 97.527,44.153 v1(98.4,44.153) Q19.1@99.284,44.153 ; Q18.1@105.716,42.248 105.843,42.375 v1(106.7,42.375) R68.1@107.6,42.375
  Bottom Layer w0.254: 41.6,40.1 43.5,40.1 44.857,41.457 47.657,41.457 v1(48.8,42.6)
  Bottom Layer w0.5: C12.2@9.145,50.7 U2.5@9.145,54.605 ; C12.2@9.275,50.7 9.275,49.67 10.773,48.172 ; TP11.1@9.8,47.5 10.1,47.5 10.773,48.172 ; 12.045,46.9 10.773,48.172 ; 12.07,46.925 14.875,46.925 ; R6.1@14.875,49 14.875,46.925 ; R70.1@20.6,42.175 21.7,41.075 21.7,38.7 ; J8.8@22.1,50.725 23.625,50.725 ; R72.1@25.6,42.175 25.6,42.1 26.5,41.2 26.5,38.7 ; 26.9,47.025 R11.2@26.9,48.175 ; 31.6,38.7 R59.1@31.6,42.175 ; R10.1@32.9,48.175 31.65,46.925 23.7,46.925 ; 36.6,38.7 R50.1@36.6,42.175 ; R43.2@41.6,42.175 41.6,40.1 41.6,39.4 40.9,38.7 26.5,38.7 ; v1(47.125,69.5) 42.8,69.5 39.589,66.289 39.589,60.889 30.7,52 24.6,52 23.7,51.1 23.7,46.925 ; v1@76.425,38.875 R24.2@77.5,38.875 77.5,38.725 77.5,33.7 78.515,32.685 82.785,32.685 85.8,35.7 85.8,39.8 90.153,44.153 v1(98.4,44.153) 104.922,44.153 v1(106.7,42.375) ; 77.575,35.725 R13.1@79.5,35.725 ; 14.875,46.925 18.6,46.925 ; 18.6,46.925 18.6,39.9 19.8,38.7 21.7,38.7 ; 18.6,46.925 23.7,46.925 ; 21.7,38.7 26.5,38.7
"3V3 NFC": C62.2 C63.2 R80.1 R81.1 TP12.1 U7.25 U8.5 | length 36.1
  Top Layer w0.254: v1(54.213,67.51) 54.71,67.51 55.013,67.813 U7.25@55.013,68.31
  Top Layer w0.5: U8.5@46.695,79.455 46.825,79.325 C62.2@48.6,79.325 C63.2@50.6,79.325 v1(51.6,79.325) R81.1@52.6,79.325 52.6,80.2 53.2,80.8 61.7,80.8 62.6,79.9 R80.1@62.6,79.325 v1(63.6,79.325)
  Bottom Layer w0.5: v1(51.6,79.325) 51.6,72.4 52.3,71.7 54,71.7 54.9,70.8 54.9,68.197 v1(54.213,67.51) ; v1(63.6,79.325) TP12.1@64.775,79.325
5VUSB: C1.2 C64.1 C65.1 D8.1 D17.1 D18.1 D19.1 J1.5 J3.6 K1.10 K2.10 K3.10 K4.10 Q20.1 Q21.1 R8.1 R69.1 R71.1 R86.1 R92.2 TP1.1 U1.53 U9.8 U10.1 U10.2 U10.3 U10.8 | length 307.5
  Top Layer w0.254: v1(30.7,68) 35.199,63.501 36.101,63.501 36.352,63.25 U1.53@36.806,62.796
  Top Layer w0.4: J3.6@95.7,3.9 95.7,21.275 C65.1@96.1,21.675
  Top Layer w0.5: K2.10@7.18,30.5 12.3,30.5 ; 12.3,68 12.3,34.7 ; D19.1@13.8,34.7 12.3,34.7 ; 15.8,29.3 15.797,29.297 ; J1.5@30.632,78.05 30.632,76.268 31.8,75.1 v1(36.1,75.1) ; R86.1@36.1,77.575 v1(36.1,75.1) ; C1.2@38.1,72.225 38.1,74.3 37.3,75.1 v1(36.1,75.1) ; K1.10@48,19.38 47.996,19.384 D8.1@43.487,19.384 43.487,18.287 43.044,17.844 40.256,17.844 39.6,18.5 39.6,26 v1(37.5,28.1) 16.994,28.1 15.797,29.297 ; K4.10@48,31.08 48,33.7 51.2,36.9 62.18,36.9 ; 62.2,36.9 62.18,36.9 ; v1(76.1,37.7) 73.5,40.3 65.58,40.3 K3.10@63.08,37.8 62.18,36.9 ; C65.1@96.1,21.675 108.38,21.675 ; R71.1@97.4,39.825 97.527,39.953 v1(98.3,39.953) Q21.1@99.284,39.953 ; U9.8@101.905,19.85 101.905,21.67 ; R92.2@105.425,35.9 105.425,37.757 105.843,38.175 v1(106.7,38.175) R69.1@107.6,38.175 v1(107.6,36.175) ; U10.3@105.865,25.35 U10.2@107.135,25.35 U10.1@108.405,25.35 ; U10.8@108.405,19.85 U10.1@108.405,25.35 ; C64.1@110.5,23.325 v1(110.5,24.325) 110.5,24.5 109.65,25.35 U10.1@108.405,25.35 ; 12.3,30.5 12.3,34.7 ; 12.3,30.5 12.3,30.3 13.303,29.297 15.797,29.297
  Top Layer w1: v2(11,68) 12.3,68 v1(30.7,68)
  Bottom Layer w0.5: R8.1@10.925,66.2 10.925,67.925 v2(11,68) ; v1(30.7,68) 30.7,66.7 32,65.4 33.6,65.4 36.1,67.9 v1(36.1,75.1) TP1.1@38.1,75.1 ; v1(37.5,28.1) 40.48,31.08 K4.10@48,31.08 D18.1@48,33.2 ; K3.10@63.08,37.8 D17.1@65.2,37.8 ; v1(76.1,37.7) 76.1,33.8 77.918,31.982 83.482,31.982 91.453,39.953 v1(98.3,39.953) 104.922,39.953 v1(106.7,38.175) ; v1(107.6,36.175) 110.5,33.275 v1(110.5,24.325)
"24V GATE": R29.1 U1.21 | length 58.5
  Top Layer w0.254: U1.21@41.049,53.604 52.71,41.943 76.157,41.943 77.6,40.5 77.6,27.984 79.084,26.5 R29.1@80.975,26.5
"36V GATE": R35.1 U1.22 | length 63.5
  Top Layer w0.254: U1.22@41.402,53.957 52.96,42.4 76.8,42.4 78.187,41.013 78.187,28.288 v1(78.975,27.5) v1@78.975,27.609 ; v1(84.975,26.5) R35.1@85.975,26.5
  Bottom Layer w0.254: v1(78.975,27.5) 79.975,26.5 v1(84.975,26.5)
"48V GATE": R41.1 U1.23 | length 68.3
  Top Layer w0.254: U1.23@41.756,54.311 53.167,42.9 77.4,42.9 78.975,41.325 v1(78.975,28.5) ; v1(89.975,26.5) R41.1@90.975,26.5
  Bottom Layer w0.254: v1(78.975,28.5) 80.275,27.2 89.275,27.2 v1(89.975,26.5)
"ADC CHR": U1.5 U4.1 U4.4 | length 27.3
  Top Layer w0.254: U1.5@34.331,56.079 29.1,50.847 29.1,47.7 29.5,47.3 38.66,47.3 U4.1@41.205,44.755 41.885,44.755 U4.4@43.795,42.845
"ADC IC": C5.1 R126.2 U1.1 U12.1 | length 27.9
  Top Layer w0.254: U12.1@20.205,44.755 20.205,44.781 v1(21.17,45.745) U1.1@32.917,57.493 ; R126.2@20.675,38.8 v1(20.675,39.8) C5.1@20.675,40.8
  Bottom Layer w0.254: v1(20.675,39.8) 20.1,39.8 19.3,40.6 19.3,44.3 20.745,45.745 v1(21.17,45.745)
"ADC ID": C21.1 R123.2 U1.2 U13.1 | length 24.5
  Top Layer w0.254: U13.1@25.205,44.755 25.205,49.074 U1.2@33.271,57.139 ; R123.2@25.675,38.8 v1(25.675,39.8) C21.1@25.675,40.8
  Bottom Layer w0.254: v1(25.195,45.755) 24.5,45.06 24.5,40.975 v1(25.675,39.8)
"ADC PACK C": U1.4 U5.1 U5.4 | length 23.4
  Top Layer w0.254: U1.4@33.978,56.432 28.5,50.954 28.5,47.5 29.2,46.8 34.16,46.8 U5.1@36.205,44.755 36.885,44.755 U5.4@38.795,42.845
"ADC PACK D": U1.3 U6.1 U6.4 | length 19.5
  Top Layer w0.254: U1.3@33.624,56.786 27.9,51.062 27.9,47.453 30.598,44.755 U6.1@31.205,44.755 31.885,44.755 U6.4@33.795,42.845
ASK/OOK: U1.44 U7.12 | length 26.8
  Top Layer w0.254: U1.44@41.049,62.796 42.099,63.847 42.099,69.699 48.2,75.8 56.1,75.8 57.013,74.887 U7.12@57.013,73.29 U7.12@56.993,73.31
"CHG GATE": R73.2 U1.18 | length 29.2
  Top Layer w0.254: U1.18@39.988,52.543 45.7,46.831 45.7,39.8 41.575,35.675 R73.2@41.575,27.4
"CHR EN": U1.25 U3.2 | length 51.2
  Top Layer w0.254: U1.25@42.463,55.018 53.281,44.2 77.7,44.2 84.075,37.825 U3.2@84.075,35.4
CHR_A0: U1.24 U3.1 | length 50.7
  Top Layer w0.254: U1.24@42.11,54.664 53.031,43.743 77.511,43.743 83.425,37.828 U3.1@83.425,35.4
CHR_A1: U1.26 U3.16 | length 46.6
  Top Layer w0.254: U1.26@42.817,55.372 53.488,44.7 78.2,44.7 82.1,40.8 U3.16@83.425,40.8
D+: J1.3 R3.1 TP3.1 | length 17.5
  Top Layer w0.5: v1(29.032,80.05) J1.3@29.032,78.05 29.032,74.968 31.1,72.9 R3.1@31.1,72.225
  Bottom Layer w0.5: TP3.1@21.032,78.05 27.032,78.05 v1(29.032,80.05)
D-: J1.4 R2.2 TP2.1 | length 18.6
  Top Layer w0.5: v1(29.832,80.05) J1.4@29.832,78.05 29.832,75.668 33.1,72.4 R2.2@33.1,72.225
  Bottom Layer w0.5: TP2.1@23.032,75.05 25.85,75.05 29.8,79 29.8,80.018 v1(29.832,80.05)
DATA_CLK: U1.36 U7.26 | length 17.5
  Top Layer w0.254: U1.36@43.877,59.968 44.677,60.768 v1(44.677,61.168) ; v1(46.545,59.3) 53.945,66.7 54.547,66.7 54.9,66.7 55.513,67.313 U7.26@55.513,68.31 U7.26@55.493,68.29
  Bottom Layer w0.254: v1(44.677,61.168) v1(46.545,59.3)
"DIS GATE": R103.2 U1.9 | length 26.5
  Top Layer w0.254: R103.2@14.175,43.275 R103.2@14.175,43.1 15.475,44.4 17.9,44.4 24.4,50.9 v1(25.2,50.9) ; v1(33.746,53.664) 34.746,53.664 U1.9@35.746,54.664
  Bottom Layer w0.254: v1(25.2,50.9) 30.981,50.9 v1(33.746,53.664)
GND: C1.1 C2.2 C3.2 C6.1 C7.1 C8.2 C9.1 C10.1 C11.1 C12.1 C13.2 C14.2 C15.2 C16.2 C17.1 C18.2 C19.2 C20.1 C22.2 C23.2 C27.2 C28.2 C31.2 C32.2 C34.2 C35.2 C38.1 C39.2 C40.2 C41.2 C42.2 C43.2 C44.2 C45.2 C46.1 C47.1 C48.1 C49.1 C52.2 C53.2 C55.2 C57.2 C59.2 C60.1 C61.1 C62.1 C63.1 C64.2 C65.2 C66.1 C69.2 C70.2 D13.2 D14.2 D15.2 D16.2 D20.2 J1.0@24.782,78.05 J1.0@24.782,83.55 J1.0@33.282,78.05 J1.0@33.282,83.55 J1.1 J3.3 J3.4 J8.7 K1.4 K3.7 K4.7 Q2.2 Q3.2 Q5.2 Q7.2 Q9.2 Q10.2 Q13.2 Q22.2 Q24.2 R4.2 R21.1 R22.2 R25.1 R30.1 R31.1 R36.1 R37.1 R42.1 R45.2 R49.1 R54.2 R58.1 R61.2 R74.1 R83.1 R85.2 R104.1 R120.2 TP4.1 U1.0 U1.14 U1.16 U1.39 U1.49 U1.56 U2.2 U2.4 U3.3 U3.15 U4.2 U5.2 U6.2 U7.6 U7.7 U7.10 U7.15 U7.29 U7.33 U8.2 U8.4 U9.2 U9.3 U9.4 U9.5 U10.5 U11.3 U11.15 U11.16 U12.2 U13.2 | length 521.9
  Top Layer w0.254: C70.2@22.325,34.8 v1(22.325,35.8) R61.2@22.325,36.8 ; U13.2@25.205,43.8 v1@29,43.8 ; C23.2@27.325,34.8 v1(27.325,35.8) R120.2@27.325,36.8 ; U6.2@31.205,43.8 31.8,43.8 32.4,43.2 32.4,41.725 C35.2@33.325,40.8 ; R58.1@33.325,38.8 C35.2@33.325,40.8 ; U1.56@35.746,61.736 U1.0@38.928,58.554 ; 36.5,66.8 36.5,65.931 U1.49@38.22,64.21 38.928,63.503 U1.0@38.928,58.554 ; U1.14@37.513,52.897 38.928,54.311 ; R49.1@38.325,38.8 C32.2@38.325,40.8 ; C19.2@47.125,66.5 C18.2@47.125,64.5 45.925,63.3 45.088,63.3 U1.39@42.817,61.028 40.342,58.554 U1.0@38.928,58.554 ; U7.15@55.513,73.29 55.513,72.019 U7.33@56.763,70.769 ; v1(56.8,65.7) 57.013,65.913 U7.29@57.013,68.31 57.013,70.519 U7.33@56.763,70.769 ; U7.10@58.013,73.29 58.013,72.019 U7.7@59.265,72.019 v1(64.781,72.019) ; U7.6@59.265,71.519 57.513,71.519 U7.33@56.763,70.769 ; R21.1@75.6,46.075 75.727,45.948 Q2.2@77.584,45.948 81.373,45.948 R22.2@81.6,46.175 81.6,43.6 82.565,42.635 83.465,42.635 84.075,42.025 U3.15@84.075,40.8 v1(84.075,39.575) 84.075,38.525 84.725,37.875 U3.3@84.725,35.4 ; C65.2@96.1,23.325 v1(96.1,24.325) ; v1(97.095,19.85) U9.5@98.095,19.85 ; v1(103.595,19.85) U10.5@104.595,19.85 ; 104.325,30.625 U11.3@105.3,30.625 104.125,30.625 103.8,30.3 103.8,28.7 v1(104.4,28.1) ; C35.2@33.325,40.8 34.5,40.8 35,41.3 35,43.4 35.4,43.8 U5.2@36.205,43.8 36.8,43.8 37.5,43.1 37.5,41.625 C32.2@38.325,40.8 ; C32.2@38.325,40.8 39.3,40.8 39.9,41.4 39.9,43.5 40.2,43.8 U4.2@41.205,43.8 42,43.8 42.5,43.3 42.5,41.625 C28.2@43.325,40.8 44.3,40.8 44.9,41.4 v1(44.9,42.2) 44.9,46.5 43.225,48.175 C17.1@40.9,48.175 40.875,48.2 v1(39.5,48.2) 39.5,50.91 U1.16@38.22,52.19 38.928,52.897 38.928,54.311 ; 38.928,54.311 U1.0@38.928,58.2 U1.0@38.928,58.554
  Top Layer w0.5: v1(6.7,63.2) v1(10.925,63.2) 10.925,59.025 v1(10.1,58.2) ; Q22.2@14.048,38.716 14.048,40.773 R104.1@14.175,40.9 ; U12.2@20.205,43.8 23.7,43.8 U13.2@25.205,43.8 ; R4.2@27.1,72.225 v1(28.1,72.225) C3.2@29.1,72.225 ; v1(27.432,76.05) J1.1@27.432,78.05 ; v1(29,43.8) 29.6,43.8 ; v1(29.6,34.2) 29.6,43.8 ; v1(29.9,48.175) 33.1,48.175 34,48.175 35.2,48.175 v1(35.9,48.175) ; U6.2@31.205,43.8 29.6,43.8 ; v1(34.1,73.225) C2.2@35.1,72.225 35.975,72.225 36.5,71.7 36.5,66.8 ; 36.525,70.575 C1.1@38.1,70.575 ; v1(39.1,81.225) 38.1,80.225 C60.1@38.1,79.225 C61.1@40.1,79.225 40.1,80.1 40.6,80.6 44.9,80.6 45.3,80.2 45.3,78 45.755,77.545 U8.4@46.695,77.545 46.825,77.675 C62.1@48.6,77.675 C63.1@50.6,77.675 ; Q24.2@41.448,23.416 41.448,25.273 R74.1@41.575,25.4 ; v1(43,32.752) v1(47,36.752) ; v1(43.6,29.9) 44.3,29.2 56.5,29.2 62.1,29.2 K3.7@63.08,30.18 ; U8.2@44.105,78.5 45.3,78.5 ; C47.1@54.6,79.325 v1(55.6,79.325) C46.1@56.6,79.325 C49.1@58.6,79.325 C48.1@60.6,79.325 ; 55.62,29.2 K4.7@55.62,31.08 ; v1(65.975,75.9) R83.1@66.975,75.9 C59.2@66.975,77.9 ; C52.2@67.625,73.6 v1(68.8,73.6) C53.2@69.975,73.6 ; v1(68.852,38.775) 69.081,39.003 72.997,39.003 v1(73.4,38.6) ; v1(70.975,76.9) C57.2@70.975,77.9 ; v1(72.975,74.9) C55.2@72.975,75.9 ; v1(79.847,22.216) Q5.2@80.847,22.216 80.975,22.343 R30.1@80.975,24.3 ; R25.1@82.625,30.9 v1(83.625,29.9) ; v1(84.847,22.216) Q7.2@85.847,22.216 85.975,22.343 R36.1@85.975,24.3 ; R31.1@87.625,30.9 v1(88.625,30.9) ; v1(89.848,22.216) Q9.2@90.848,22.216 90.848,24.173 R42.1@90.975,24.3 ; R37.1@92.625,30.9 v1(93.625,30.9) ; v1(96.1,24.325) 97.125,25.35 U9.4@98.095,25.35 U9.3@99.365,25.35 U9.2@100.635,25.35 ; v1(98.675,35.9) C66.1@99.675,35.9 ; 99.9,25.35 v1(99.9,28.1) U11.16@99.9,29.325 U11.15@99.9,29.975 ; v1(110.5,20.675) C64.2@110.5,21.675
  Top Layer w1: J1.0@24.782,78.05 J1.0@24.782,83.55 ; J1.0@33.282,78.05 J1.0@33.282,83.55 ; v1(85.4,6.4) 89.7,6.4 90.6,5.5 90.6,3.8
  Mid-Layer 1 w1: v1(55.62,25) 64.62,16 76.2,16 78.3,13.9 78.3,8.8 80.7,6.4 v1(85.4,6.4)
  Bottom Layer w0.254: C34.2@33.4,42.175 v1(35,42.175) ; C31.2@38.4,42.175 v1(39.9,42.175) ; C27.2@43.425,42.2 v1(44.9,42.2)
  Bottom Layer w0.5: v1(10.1,58.2) U2.2@10.1,57.195 10.1,56.1 11.055,55.145 U2.4@11.055,54.605 11.055,50.83 C12.1@10.925,50.7 14.575,50.7 C6.1@14.875,51 ; C10.1@10.925,62.2 v1(10.925,63.2) C9.1@10.925,64.2 ; C8.2@18.925,62.1 C7.1@20.575,62.1 ; J8.7@22.1,51.975 22.675,51.975 25.1,54.4 ; 22.325,34.375 v1(22.325,35.8) ; C69.2@22.4,42.175 23.175,42.175 23.7,42.7 v1(23.7,43.8) ; 27.325,34.425 v1(27.325,35.8) ; C22.2@27.4,42.175 28.475,42.175 29,42.7 v1(29,43.8) ; C16.2@28.9,48.175 v1(29.9,48.175) C13.2@30.9,48.175 ; C15.2@34.9,48.175 v1(35.9,48.175) C14.2@36.9,48.175 ; C14.2@36.925,48.2 v1(39.5,48.2) ; 39.348,32.752 v1(43,32.752) ; R54.2@46,36.625 46.127,36.752 v1(47,36.752) Q13.2@48.084,36.752 ; v1(55.6,79.325) 55.6,81.2 ; v1(56.8,65.7) 60.3,65.7 61.2,64.8 61.2,63.3 ; C39.2@60.425,63.3 61.2,63.3 ; 60.9,81.7 60.9,80.2 63.65,77.45 64.7,76.4 C40.2@64.7,75.3 64.725,75.275 64.725,71.3 C45.2@64.725,65.3 ; C38.1@61.975,63.3 61.2,63.3 ; v1(65.975,75.9) 68.8,75.9 ; R45.2@68.725,39.7 68.852,39.573 v1(68.852,38.775) Q10.2@68.852,37.716 ; v1(68.8,73.6) 68.8,75.9 ; 70.975,75.925 v1(70.975,76.9) ; v1(73.4,38.6) 73.4,30.9 74.4,29.9 77.8,29.9 ; 74.7,74.9 v1(72.975,74.9) 71.975,75.9 68.8,75.9 ; D20.2@74.8,22.7 74.8,29.8 ; 76.9,78.5 v1(79.5,78.5) ; 78.9,21 78.497,21 77.747,21.75 77.747,29.847 77.8,29.9 ; C20.1@81.6,35.725 Q3.2@81.6,38.731 ; Q3.2@81.616,38.747 82.443,39.575 v1(84.075,39.575) ; 96.1,22.5 v1(96.1,24.325) ; 97.9,35.9 97.9,29.1 98.9,28.1 v1(99.9,28.1) v1(104.4,28.1) ; v1(98.675,35.9) 94.9,35.9 93.625,34.625 v1(93.625,30.9) v1(88.625,30.9) 87.625,29.9 v1(83.625,29.9) 77.8,29.9
  Bottom Layer w1: v1(55.62,25) K1.4@55.62,27 ; v1(85.4,6.4) 85.5,6.5 89.1,6.5 92.3,9.7 92.3,14.3 ; D14.2@97.3,9.2 D13.2@99.3,9.2 D16.2@101.3,9.2 D15.2@103.3,9.2 105.7,9.2
  other v1: 16.1,2.4 21.1,2.4 26.1,2.4 31.1,2.4 36.1,2.4 41.1,2.4 46.1,2.4 51.1,2.4 105.1,2.4 110.1,2.4 11.1,3.4 113.1,5.4 8.1,6.4 116.1,8.4 5.1,9.4 119.1,11.4 2.1,12.4 119.1,16.4 2.1,17.4 119.1,21.4 2.1,22.4 119.1,26.4 2.1,27.4 119.1,31.4 2.1,32.4 5.1,34.4 10.1,34.4 115,35.5 119,35.5 112.1,38.4 10.1,39.4 14.048,39.8 112.1,42.4 10.1,44.4 80.4,45.948 5.1,46.4 118.1,46.4 2.1,49.4 120.1,49.4 78.1,52.4 83.1,52.4 88.1,52.4 93.1,52.4 98.1,52.4 103.1,52.4 108.1,52.4 113.1,52.4 118.1,52.4 2.1,53.4 76.1,53.4 2.1,58.4 76.1,58.4 19.7,62.1 2.1,63.4 76.1,63.4 2.1,68.4 76.1,68.4 2.1,73.4 5.1,76.4 8.1,79.4 83.5,80 24.782,80.7 33.282,80.7 11.1,82.4 15.1,83.4 20.1,83.4 36.1,83.4 40.1,83.4 45.1,83.4 50.1,83.4 55.1,83.4 60.1,83.4 65.1,83.4 70.1,83.4 75.1,83.4
"ID PIN": J3.5 R14.2 R15.2 R16.2 R23.2 TP24.1 | length 38.8
  Top Layer w0.4: J3.5@91.6,3.9 91.6,6.6 v1(92.5,7.5)
  Top Layer w0.5: v1(92.5,7.5) 94.4,9.4 94.4,32 93.5,32.9 R14.2@92.625,32.9 R15.2@92.625,34.9 R16.2@92.625,36.9 R23.2@92.625,38.9
  Bottom Layer w0.5: v1(92.5,7.5) TP24.1@93.5,6.5
"ID SEN": Q3.3 R24.1 U1.27 | length 45.4
  Top Layer w0.254: U1.27@43.17,55.725 52.895,46 v1(72.2,46)
  Bottom Layer w0.254: v1(72.2,46) 76,46 77.5,44.5 R24.1@77.5,40.525 78.338,39.687 Q3.3@79.584,39.687